# EAGLE board Breakout (EAGLE 6.1)
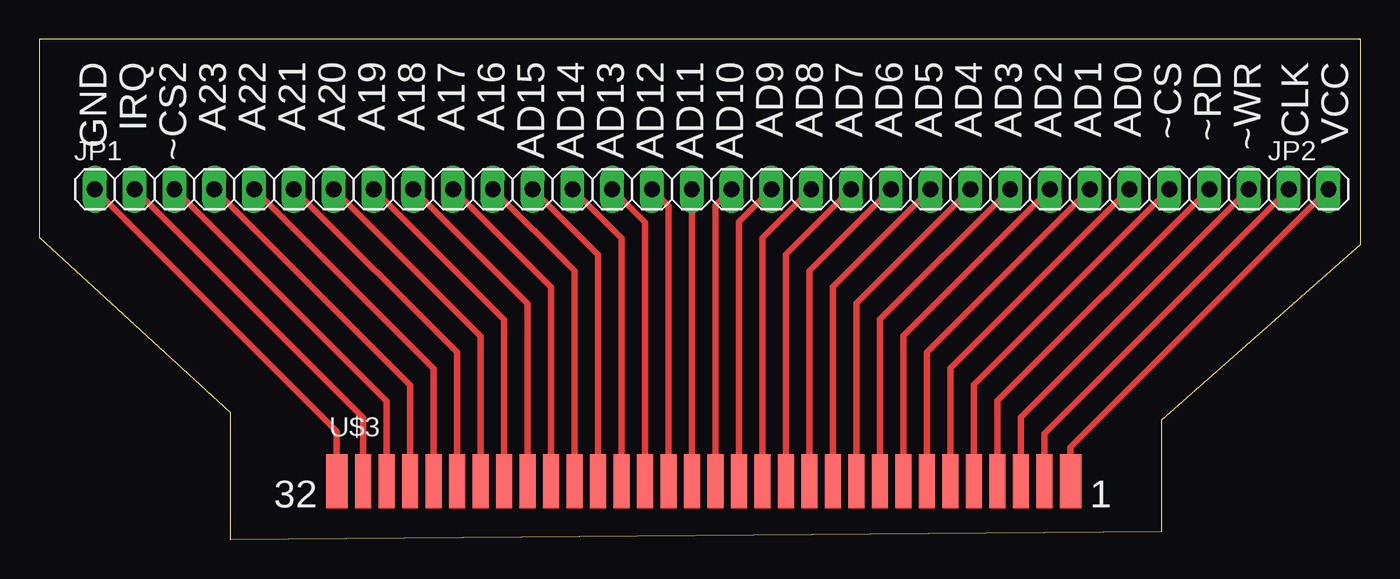
[diagram p0: board, top side]

Size 84.33 x 31.93 mm. Coordinates in mm from the lower left corner, seen from the top.
Outline: 84.31,31.93 0,31.93 0,19.3 12.19,8.13 12.19,0 71.63,0.51 71.63,7.62 84.33,18.8 84.33,31.93
Copper layers (1*16): Top 0.035mm / dielectric 1.5mm / Bottom 0.035mm
Design rules: minimum track width 10mil, minimum drill 24mil, track to track 8mil, track to pad 8mil, pad to pad 8mil, via to via 8mil, smd to smd 8mil, copper to edge 40mil, drill to drill 8mil, minimum pad ring 10mil, minimum via ring 8mil, stop-mask expansion 4mil, vias tented up to drill 0mil, thermal gap 10mil

## Footprints (pad centres in the part's own frame; a part is rotated, then mirrored left to right if it is on the bottom)
1X30 = drill 1.016 long: 1 -36.83,0; 2 -34.29,0; 3 -31.75,0; 4 -29.21,0; 5 -26.67,0; 6 -24.13,0; 7 -21.59,0; 8 -19.05,0; 9 -16.51,0; 10 -13.97,0; 11 -11.43,0; 12 -8.89,0; 13 -6.35,0; 14 -3.81,0; 15 -1.27,0; 16 1.27,0; 17 3.81,0; 18 6.35,0; 19 8.89,0; 20 11.43,0; 21 13.97,0; 22 16.51,0; 23 19.05,0; 24 21.59,0; 25 24.13,0; 26 26.67,0; 27 29.21,0; 28 31.75,0; 29 34.29,0; 30 36.83,0
1X02 = drill 1.016 long: 1 -1.27,0; 2 1.27,0
GB_CART_1 = smd 1.36 x 3.46: 1 -22.895,-0.12; 32 23.94,-0.12 | smd 1.03 x 3.46: 2 -21.225,-0.12; 3 -19.725,-0.12; 4 -18.225,-0.12; 5 -16.725,-0.12; 6 -15.225,-0.12; 7 -13.725,-0.12; 8 -12.225,-0.12; 9 -10.725,-0.12; 10 -9.225,-0.12; 11 -7.725,-0.12; 12 -6.225,-0.12; 13 -4.725,-0.12; 14 -3.225,-0.12; 15 -1.725,-0.12; 16 -0.225,-0.12; 17 1.275,-0.12; 18 2.775,-0.12; 19 4.275,-0.12; 20 5.775,-0.12; 21 7.275,-0.12; 22 8.775,-0.12; 23 10.275,-0.12; 24 11.775,-0.12; 25 13.275,-0.12; 26 14.775,-0.12; 27 16.275,-0.12; 28 17.775,-0.12; 29 19.275,-0.12; 30 20.775,-0.12; 31 22.275,-0.12

## Placement (x,y rotation side)
JP1  [1X30]  40.39,22.35 0 top
JP2  [1X02]  81.03,22.35 0 top
U$3  GB_CART1  [GB_CART_1]  41.89,3.84 0 top

## Library data of the parts
JP1 JP2 = pinhead
U$3 = alex

## Nets
A0: JP1.6 U$3.6
A1: JP1.7 U$3.7
A2: JP1.8 U$3.8
A3: JP1.9 U$3.9
A4: JP1.10 U$3.10
A5: JP1.11 U$3.11
A6: JP1.12 U$3.12
A7: JP1.13 U$3.13
A8: JP1.14 U$3.14
A9: JP1.15 U$3.15
A10: JP1.16 U$3.16
A11: JP1.17 U$3.17
A12: JP1.18 U$3.18
A13: JP1.19 U$3.19
A14: JP1.20 U$3.20
A15: JP1.21 U$3.21
AUDIO_IN: JP2.1 U$3.31
CLK: JP1.2 U$3.2
N$1: JP1.3 U$3.3
N$2: JP1.4 U$3.4
N$3: JP1.5 U$3.5
N$4: JP1.30 U$3.30
N$5: JP1.29 U$3.29
N$6: JP1.28 U$3.28
N$7: JP1.27 U$3.27
N$8: JP1.26 U$3.26
N$9: JP1.25 U$3.25
N$10: JP2.2 U$3.32
N$11: JP1.24 U$3.24
N$12: JP1.23 U$3.23
N$13: JP1.22 U$3.22
N$14: JP1.1 U$3.1

## Tracks (layer width: path | path; a pad name or v marks a point on that pad's centre or on a via)
A0
  Top 0.406: U$3.6 26.67,11.94 JP1.6
A1
  Top 0.406: U$3.7 28.17,12.98 JP1.7
A2
  Top 0.406: U$3.8 29.67,14.02 JP1.8
A3
  Top 0.406: U$3.9 31.17,15.06 JP1.9
A4
  Top 0.406: U$3.10 32.67,16.1 JP1.10
A5
  Top 0.406: U$3.11 34.17,17.14 JP1.11
A6
  Top 0.406: U$3.12 35.67,18.18 JP1.12
A7
  Top 0.406: U$3.13 37.17,19.22 JP1.13
A8
  Top 0.406: U$3.14 38.67,20.26 JP1.14
A9
  Top 0.406: U$3.15 40.17,21.3 JP1.15
A10
  Top 0.305: 41.67,22.34 JP1.16
  Top 0.406: U$3.16 41.67,22.34
A11
  Top 0.406: U$3.17 43.17,21.32 JP1.17
A12
  Top 0.406: U$3.18 44.67,20.29 JP1.18
A13
  Top 0.406: U$3.19 46.17,19.24 JP1.19
A14
  Top 0.406: U$3.20 47.67,18.21 JP1.20
A15
  Top 0.406: U$3.21 49.17,17.16 JP1.21
AUDIO_IN
  Top 0.406: U$3.31 64.17,6.77 JP2.1
CLK
  Top 0.406: U$3.2 20.67,7.78 JP1.2
N$1
  Top 0.406: U$3.3 22.17,8.82 JP1.3
N$2
  Top 0.406: U$3.4 23.67,9.86 JP1.4
N$3
  Top 0.406: U$3.5 25.17,10.9 JP1.5
N$4
  Top 0.406: U$3.30 62.67,7.8 JP1.30
N$5
  Top 0.406: U$3.29 61.17,8.85 JP1.29
N$6
  Top 0.406: U$3.28 59.67,9.88 JP1.28
N$7
  Top 0.406: U$3.27 58.17,10.93 JP1.27
N$8
  Top 0.406: U$3.26 56.67,11.96 JP1.26
N$9
  Top 0.406: U$3.25 55.17,13.01 JP1.25
N$10
  Top 0.406: U$3.32 65.83,5.89 JP2.2
N$11
  Top 0.406: U$3.24 53.67,14.05 JP1.24
N$12
  Top 0.406: U$3.23 52.17,15.09 JP1.23
N$13
  Top 0.406: U$3.22 50.67,16.13 JP1.22
N$14
  Top 0.406: U$3.1 19,6.91 JP1.1

## Text on the board
tNames: GND | IRQ | ~CS2 | A23 | A22 | A21 | A20 | A19 | A18 | A17 | A16 | AD15 | AD14 | AD13 | AD12 | AD11 | AD10 | AD9 | AD8 | AD7 | AD6 | AD5 | AD4 | AD3 | AD2 | AD1 | AD0 | ~CS | ~RD | ~WR | CLK | VCC | 32 | 1